# Altium PCB IMSAI_SIO_Emulation.PcbDoc
Units mil, origin at the board's own origin, x right, y up, seen from the top; angles counter-clockwise.
Board outline 10000 x 5455 mil, 2 copper layers (Top Layer, Bottom Layer); 85 components, 114 nets, 475 pads, 58 vias.
Unrouted connection lines stored in the file: 124.
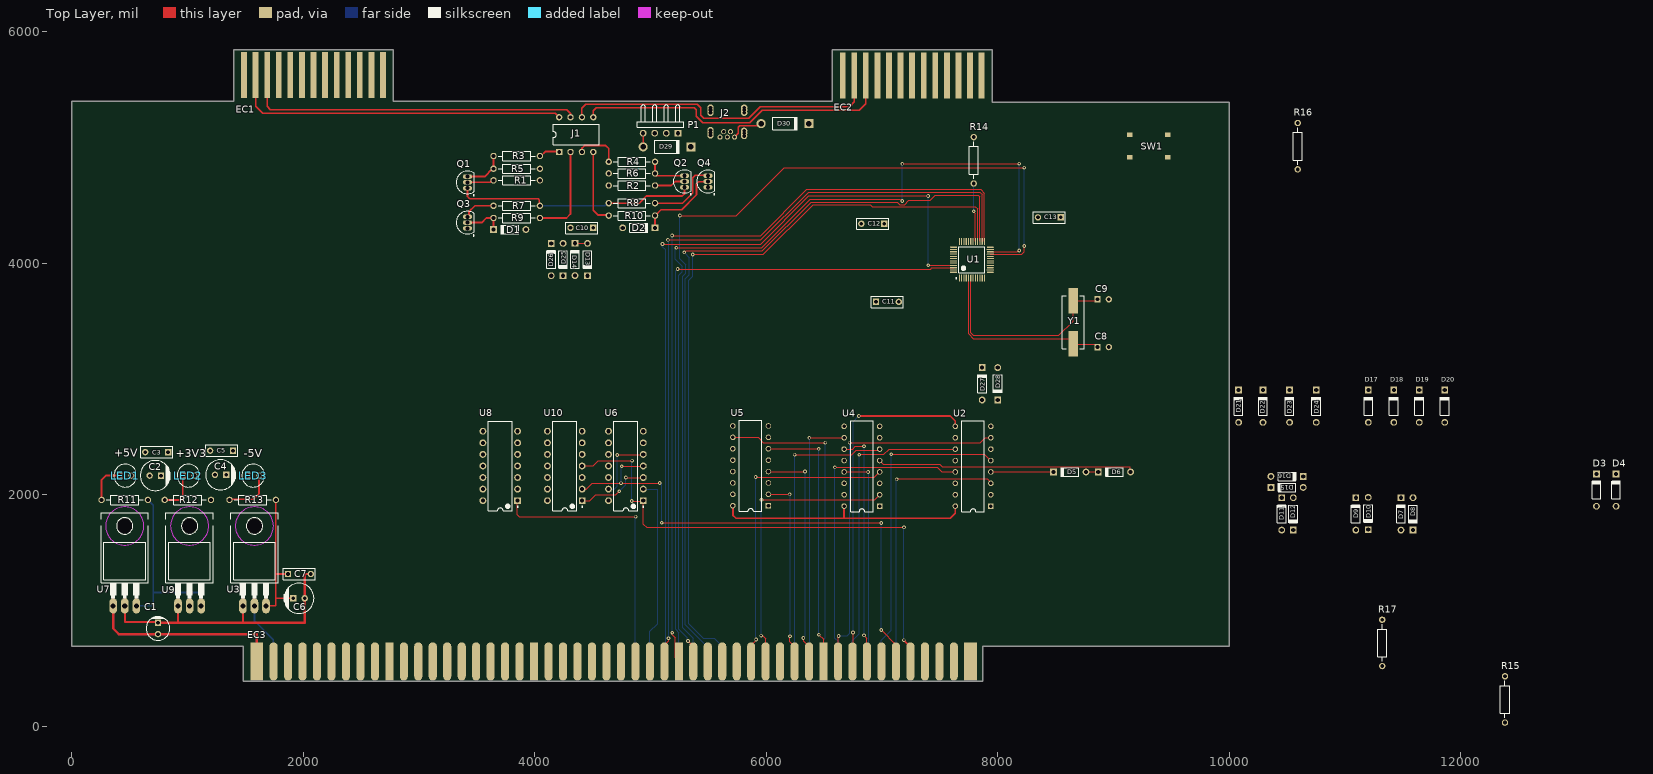
[diagram p0: Top Layer view]
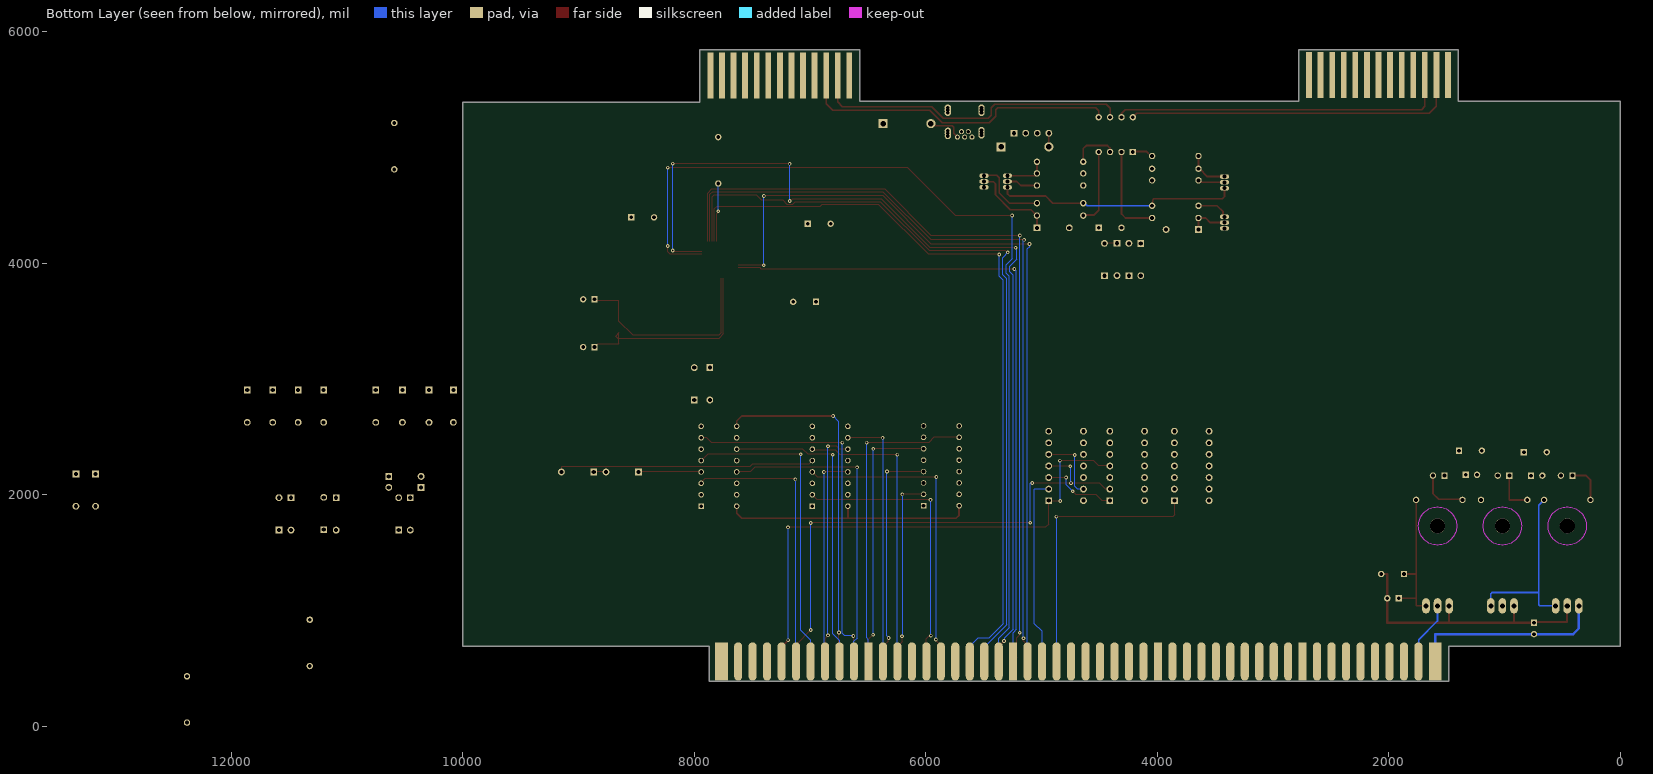
[diagram p1: Bottom Layer view, seen from below]

## Layer stack, top to bottom
Top Solder: solder mask 0.4, Solder Resist, Dk 3.5
Top Layer: signal copper 1.4
Dielectric 1: dielectric 12.6, FR-4, Dk 4.8
Bottom Layer: signal copper 1.4
Bottom Solder: solder mask 0.4, Solder Resist, Dk 3.5

## Board outline
1485,389.5 1485,689.5 0.5,689.5 0.5,5397.5 1400.5,5397.5 1400.5,5844.5 2780.5,5844.5 2780.5,5397.5 6570.5,5397.5 6570.5,5844.5 7950.5,5844.5 7950.5,5389.5 10000.5,5389.5 10000.5,689.5 7870,689.5 7870,389.5

## Design rules (kind name [scope] priority, off if disabled: settings)
Clearance [All] p1: gap=10 ignorepadtopadclearanceinfootprint=TRUE except(0: Arc-Text Track-Text SMDPad-Text THPad-Text Via-Text Fill-Text Poly-Text Region-Text; 1: Text-Text; 6: Arc-SMDPad Arc-THPad Track-SMDPad Track-THPad SMDPad-SMDPad SMDPad-THPad THPad-THPad; 8: Arc-Arc Arc-Track Arc-Via Track-Track Track-Via SMDPad-Via THPad-Via Via-Via)
PolygonConnect [All] p1: connectstyle=Relief reliefconductorwidth=10 reliefentries=4 polygonreliefangle="90 Angle" airgapwidth=10
RoutingVias [All] p1: holewidth=15.75 width=31.5 viastyle="Through Hole" minholewidth=11.81 minwidth=27.56 maxholewidth=78.74 maxwidth=118.11
SolderMaskExpansion [All] p1: expansion=4
Width [All] p1: maxlimit=50 minlimit=8 preferedwidth=15
30 further rules are at their usual default settings.

## Components (designator, comment, footprint, x,y, rotation, side; value= is the part's Value field where it differs from the comment)
C1 "Capacitor 10uF" "Cap THT 2.5-5-11" 747,845 r270 top value=10uF
C2 "Capacitor 100uF" "CAP THT 2.5-6.5-12" 723.79,2165 r180 top value=100uF
C3 "Capacitor .1uF" "CAP THT 2.5x5x5" 735.57,2368 r180 top value=.1uF
C4 "Capacitor 100uF" "CAP THT 2.5-6.5-12" 1288,2172 r180 top value=100uF
C5 "Capacitor .1uF" "CAP THT 2.5x5x5" 1296,2381 r180 top value=.1uF
C6 "Capacitor 100uF" "CAP THT 2.5-6.5-12" 1965,1105 r0 top value=100uF
C7 "Capacitor .1uF" "CAP THT 2.5x5x5" 1968.43,1315 r0 top value=.1uF
C8 "Capacitor 33pF" "Cap THT 2.5-2-4 Ceramic" 8910,3275 r0 top value=33pF
C9 "Capacitor 33pF" "Cap THT 2.5-2-4 Ceramic" 8910,3687.01 r0 top value=33pF
C10 "Capacitor .1uF" "CAP THT 2.5x5x5" 4408.43,4305 r180 top value=.1uF
C11 "Capacitor .1uF" "CAP THT 2.5x5x5" 7046.57,3665 r0 top value=.1uF
C12 "Capacitor .1uF" "CAP THT 2.5x5x5" 6920,4340 r180 top value=.1uF
C13 "Capacitor .1uF" "CAP THT 2.5x5x5" 8445,4395 r180 top value=.1uF
D1 "Diode 1N4148" DO-35 3784.76,4290 r180 top
D2 "Diode 1N4148" DO-35 4900.24,4305 r0 top
D3 "Diode 1N4148" DO-35 13170,2040 r90 top
D4 "Diode 1N4148" DO-35 13340,2040 r90 top
D5 "Diode 1N4148" DO-35 8622,2196.57 r180 top
D6 "Diode 1N4148" DO-35 9007,2196.57 r180 top
D7 "Diode 1N4148" DO-35 11482,1834 r90 top
D8 "Diode 1N4148" DO-35 11586,1834 r270 top
D9 "Diode 1N4148" DO-35 11092,1834 r90 top
D10 "Diode 1N4148" DO-35 11199,1837.76 r270 top
D11 "Diode 1N4148" DO-35 10452,1834 r90 top
D12 "Diode 1N4148" DO-35 10552,1834 r270 top
D13 "Diode 1N4148" DO-35 4457,4031 r270 top
D14 "Diode 1N4148" DO-35 4348,4032 r90 top
D15 "Diode 1N4148" DO-35 10498,2063 r180 top
D16 "Diode 1N4148" DO-35 10498,2158 r0 top
D17 "Diode 1N4148" DO-35 11200,2765 r90 top
D18 "Diode 1N4148" DO-35 11420,2765 r90 top
D19 "Diode 1N4148" DO-35 11640,2765 r90 top
D20 "Diode 1N4148" DO-35 11860,2765 r90 top
D21 "Diode 1N4148" DO-35 10080,2765 r90 top
D22 "Diode 1N4148" DO-35 10290,2765 r90 top
D23 "Diode 1N4148" DO-35 10520,2765 r90 top
D24 "Diode 1N4148" DO-35 10750,2765 r90 top
D25 "Diode 1N4148" DO-35 4246,4031 r270 top
D26 "Diode 1N4148" DO-35 4143,4031 r90 top
D27 "Diode 1N4148" DO-35 7865.12,2958 r90 top
D28 "Diode 1N4148" DO-35 7999.12,2958 r270 top
D29 "Diode 1N4001" DO-41 5142.91,5004 r0 top
D30 "Diode 1N4001" DO-41 6162,5205 r0 top
EC1 "S100 Serial Edge Connector" "E26 Edge Connector" 1490,5625 r0 top
EC2 "S100 Serial Edge Connector" "E26 Edge Connector" 6660,5620 r0 top
EC3 "S100 Connector" S100 1600,560 r0 top
J1 "DIP8 Jumper" DIP8 4211.57,4960 r90 top
J2 "USB Mini B" "USB Mini B" 5664,5088 r0 top
LED1 "Generic LED 5mm" "LED 5mm THT" 465,2165 r0 top
LED2 "Generic LED 5mm" "LED 5mm THT" 1010,2165 r0 top
LED3 "Generic LED 5mm" "LED 5mm THT" 1570,2165 r0 top
P1 "Header 4H" HDR1X4H 5237,5122 r180 top
Q1 "2N3906" TO-92A 3420,4697.48 r0 top
Q2 "2N3906" TO-92A 5295,4705 r0 top
Q3 "2N3904" TO-92A 3420,4350 r0 top
Q4 "2N3904" TO-92A 5497,4705 r0 top
R1 "Res2" AXIAL-0.4 3845,4715 r0 top
R2 "Res2" AXIAL-0.4 4840,4670 r180 top
R3 "Res2" AXIAL-0.4 3845,4925 r180 top
R4 "Res2" AXIAL-0.4 4840,4875 r0 top
R5 "Res2" AXIAL-0.4 3845,4815 r180 top
R6 "Res2" AXIAL-0.4 4840,4775 r0 top
R7 "Res2" AXIAL-0.4 3845,4495 r180 top
R8 "Res2" AXIAL-0.4 4840,4517.68 r0 top
R9 "Res2" AXIAL-0.4 3845,4390 r180 top
R10 "Res2" AXIAL-0.4 4840,4410 r0 top
R11 "Res2" AXIAL-0.4 460,1955 r0 top
R12 "Res2" AXIAL-0.4 1005,1955 r0 top
R13 "Res2" AXIAL-0.4 1565,1955 r0 top
R14 "Res2" AXIAL-0.4 7792,4888 r90 top
R15 "Res2" AXIAL-0.4 12380,231.56 r90 top
R16 "Res2" AXIAL-0.4 10590,5010 r90 top
R17 "Res2" AXIAL-0.4 11320,720 r90 top
SW1 "Button" SMD_PUSHBUTTON_LCSC 9468.74,4915 r180 top
U1 "STM32F103C8T6" STM-LQFP48_L 7776.54,4029.21 r90 top
U2 "74LS367" DIP16 7940,1901.3 r180 top
U3 "LM7805" TO220 1580,1290 r0 top
U4 "74LS367" DIP16 6979.56,1901.3 r180 top
U5 "74LS367" DIP16 6019.11,1904.72 r180 top
U6 "SN74LS10N" N0014A 4788,2248.23 r180 top
U7 "LM7805" TO220 460,1290 r0 top
U8 "SN74LS04N" N0014A 3703,2248.23 r180 top
U9 "AMS1117-3.3" TO220 1020,1290 r0 top
U10 "SN74LS09N" N0014A 4260.44,2248.23 r180 top
Y1 "=VALUE" "ABRACON ABLS" 8650,3490 r270 top

## Footprints (in the part's own frame and the unit in brackets; to place one, negate y for a bottom-side part, rotate by r counter-clockwise, add the part's x,y. Pads: shape width x height; smd on the part's side, far side on the other; paste and mask are expansions set on the pad)
"ABRACON ABLS" [mm] "Crystal, 2-Leads, Body 4.70x11.40mm, Pitch 8.80mm, IPC Medium Density"
  rect 5.6x2.1 smd: 1(-4.75,0) 2(4.75,0)
  silkscreen extent -5.77,-2.42 5.78,2.42, body extent -6.35,-2.35 6.35,2.35, height 4.2
AXIAL-0.4 [mm] "Axial Device, Thru-Hole; 2 Leads; 0.4 in Pin Spacing"
  round 1.4 hole 0.85: 1(-5.08,0) 2(5.08,0)
  silkscreen extent -4.06,-1.02 4.06,1.02
"Cap THT 2.5-2-4 Ceramic" [mm]
  round 1.4 hole 0.8: 1(1.25,0)
  rect 1.4x1.4 hole 0.8: 2(-1.25,0)
"Cap THT 2.5-5-11" [mm] "Capacitor 5mm Radius x 2.5mm lead spacing 11.5mm Height"
  round 1.4 hole 0.8: 1(1.25,0)
  rect 1.4x1.4 hole 0.8: 2(-1.25,0)
  silkscreen extent -2.6,-2.6 2.6,2.6, body extent -3.25,-3.25 3.25,3.25, height 11.51
"CAP THT 2.5-6.5-12" [mm]
  round 1.4 hole 0.8: 1(1.25,0)
  rect 1.4x1.4 hole 0.8: 2(-1.25,0)
  silkscreen extent -3.3,-3.3 3.3,3.3, body extent -3.25,-3.25 3.25,3.25, height 11.51
"CAP THT 2.5x5x5" [mm]
  rect 1.4x1.4 hole 0.8: 1(-2.5,0)
  round 1.4 hole 0.8: 2(2.5,0)
  silkscreen extent -3.5,-1.25 3.5,1.25, body extent -3.56,-1.27 3.43,1.27, height 6.5
DIP8 [mm]
  rect 1.4x1.4 hole 0.8: 1(0,0)
  round 1.4 hole 0.8: 2(0,-2.5) 3(0,-5) 4(0,-7.5) 5(7.62,-7.5) 6(7.62,-5) 7(7.62,-2.5) 8(7.62,0)
  silkscreen extent 1.53,-8.75 6.09,1.25
DIP16 [mm]
  rect 1.2x1.2 hole 0.8: 1(0,0)
  round 1.2 hole 0.8: 2(0,-2.5) 3(0,-5) 4(0,-7.5) 5(0,-10) 6(0,-12.5) 7(0,-15) 8(0,-17.5) 9(7.8,-17.5) 10(7.8,-15) 11(7.8,-12.5) 12(7.8,-10) 13(7.8,-7.5) 14(7.8,-5) 15(7.8,-2.5) 16(7.8,0)
  silkscreen extent 1.43,-18.75 6.37,1.25
DO-35 [mm] "Diode, Axial; Body 3.8 x 1.9 mm (LxDia. max), Lead Dia. 0.53 mm (max)"
  round 1.5 hole 0.9: 1(-3.55,0)
  rect 1.5x1.5 hole 0.9: 2(3.55,0)
  silkscreen extent -1.95,-0.95 2.05,0.95
DO-41 [mm] "Diode, Axial; Body 5.2 x 2.7 mm (LxDia. max), Lead Dia. 0.86 mm (max)"
  round 2 hole 1.2: 1(-5.23,0)
  rect 2x2 hole 1.2: 2(5.23,0)
  silkscreen extent -2.65,-1.4 2.75,1.4
"E26 Edge Connector" [mil] "26 Pin Edge Connector"
  rect 50x400 smd: 1(0,0) 3(100,0) 5(200,0) 7(300,0) 9(400,0) 11(500,0) 13(600,0) 15(700,0) 17(800,0) 19(900,0) 21(1000,0) 23(1100,0) 25(1200,0)
  rect 50x400 smd far side: 2(0,0) 4(100,0) 6(200,0) 8(300,0) 10(400,0) 12(500,0) 14(600,0) 16(700,0) 18(800,0) 20(900,0) 22(1000,0) 24(1100,0) 26(1200,0)
HDR1X4H [mm] "Connector; Header; 4 Position; Right Angle"
  rect 1.5x1.5 hole 0.9: 1(0,0)
  round 1.5 hole 0.9: 2(2.54,0) 3(5.08,0) 4(7.62,0)
  silkscreen extent -1.27,-6.35 8.89,-1.27
"LED 5mm THT" [mil]
  rect 55x55 hole 35.43: 1(-50,0)
  round 55 hole 35.43: 2(50,0)
  silkscreen extent -99,-99 90,99
N0014A [mm] "DIP, 14-Leads, Body 19.7x6.6mm, Pitch 2.54mm"
  rect 1.5x1.5 hole 0.9: 1(-3.81,7.62)
  round 1.5 hole 0.9: 2(-3.81,5.08) 3(-3.81,2.54) 4(-3.81,0) 5(-3.81,-2.54) 6(-3.81,-5.08) 7(-3.81,-7.62) 8(3.81,-7.62) 9(3.81,-5.08) 10(3.81,-2.54) 11(3.81,0) 12(3.81,2.54) 13(3.81,5.08) 14(3.81,7.62)
  silkscreen extent -3.94,-9.85 2.65,9.85, body extent -3.95,-9.85 3.95,9.85, height 5.08
S100 [mil]
  rect 110x330 smd: 1(0,0) 50(6165,0)
  oval 70x330 smd: 2(145,0) 3(270,0) 4(395,0) 5(520,0) 6(645,0) 7(770,0) 8(895,0) 9(1020,0) 11(1270,0) 12(1395,0) 13(1520,0) 14(1645,0) 15(1770,0) 16(1895,0) 17(2020,0) 18(2145,0) 19(2270,0) 21(2520,0) 22(2645,0) 23(2770,0) 24(2895,0) 25(3020,0) 26(3145,0) 27(3270,0) 28(3395,0) 29(3520,0) 31(3770,0) 32(3895,0) 33(4020,0) 34(4145,0) 35(4270,0) 36(4395,0) 37(4520,0) 38(4645,0) 39(4770,0) 41(5020,0) 42(5145,0) 43(5270,0) 44(5395,0) 45(5520,0) 46(5645,0) 47(5770,0) 48(5895,0) 49(6020,0)
  rect 70x330 smd: 10(1145,0) 20(2395,0) 30(3645,0) 40(4895,0)
  rect 110x330 smd far side: 51(0,0) 100(6165,0)
  oval 70x330 smd far side: 52(145,0) 53(270,0) 54(395,0) 55(520,0) 56(645,0) 57(770,0) 58(895,0) 59(1020,0) 61(1270,0) 62(1395,0) 63(1520,0) 64(1645,0) 65(1770,0) 66(1895,0) 67(2020,0) 68(2145,0) 69(2270,0) 71(2520,0) 72(2645,0) 73(2770,0) 74(2895,0) 75(3020,0) 76(3145,0) 77(3270,0) 78(3395,0) 79(3520,0) 81(3770,0) 82(3895,0) 83(4020,0) 84(4145,0) 85(4270,0) 86(4395,0) 87(4520,0) 88(4645,0) 89(4770,0) 91(5020,0) 92(5145,0) 93(5270,0) 94(5395,0) 95(5520,0) 96(5645,0) 97(5770,0) 98(5895,0) 99(6020,0)
  rect 70x330 smd far side: 60(1145,0) 70(2395,0) 80(3645,0) 90(4895,0)
SMD_PUSHBUTTON_LCSC [mm]
  rect 1.15x1 smd: 1(0,0) 1(8.35,0) 2(0,-4.9) 2(8.35,-4.9)
STM-LQFP48_L [mm] "QFP, 48-Leads, Body 7x7mm, Pitch 0.5mm, IPC High Density"
  oval 1.55x0.25 smd: 1(-4.025,2.75) 2(-4.025,2.25) 3(-4.025,1.75) 4(-4.025,1.25) 5(-4.025,0.75) 6(-4.025,0.25) 7(-4.025,-0.25) 8(-4.025,-0.75) 9(-4.025,-1.25) 10(-4.025,-1.75) 11(-4.025,-2.25) 12(-4.025,-2.75) 25(4.025,-2.75) 26(4.025,-2.25) 27(4.025,-1.75) 28(4.025,-1.25) 29(4.025,-0.75) 30(4.025,-0.25) 31(4.025,0.25) 32(4.025,0.75) 33(4.025,1.25) 34(4.025,1.75) 35(4.025,2.25) 36(4.025,2.75)
  oval 0.25x1.55 smd: 13(-2.75,-4.025) 14(-2.25,-4.025) 15(-1.75,-4.025) 16(-1.25,-4.025) 17(-0.75,-4.025) 18(-0.25,-4.025) 19(0.25,-4.025) 20(0.75,-4.025) 21(1.25,-4.025) 22(1.75,-4.025) 23(2.25,-4.025) 24(2.75,-4.025) 37(2.75,4.025) 38(2.25,4.025) 39(1.75,4.025) 40(1.25,4.025) 41(0.75,4.025) 42(0.25,4.025) 43(-0.25,4.025) 44(-0.75,4.025) 45(-1.25,4.025) 46(-1.75,4.025) 47(-2.25,4.025) 48(-2.75,4.025)
  silkscreen extent -4.15,-2.85 2.85,3.55, body extent -3.5,-3.5 3.5,3.5, height 1.6
TO220 [mil]
  oval 66x132 hole 44: 1(-100,-250) 2(0,-250) 3(100,-250)
  round 130 hole 130 unplated: None(0,440)
  Keep-Out Layer circle w0: c0,440 r165
  Keep-Out Layer circle w0: c0,440 r165
  Keep-Out Layer circle w0: c0,440 r165
  Keep-Out Layer circle w0: c0,440 r165
  Keep-Out Layer circle w0: c0,440 r165
  Keep-Out Layer circle w0: c0,440 r165
  silkscreen extent -205,-185 205,555, body extent -243,-310 225,560, height 69
TO-92A [mm] "TO, Flat Index; 3 In-Line, Axial Leads; Body Dia. 4.5mm; Leads 0.51 x 0.48 mm (max)"
  oval 2x1 hole 0.9: 1(0,-1.27) 2(0,0) 3(0,1.27)
  silkscreen extent -2.48,-2.95 1.5,2.48, body extent -2.48,-2.5 1.5,2.5, height 6.86
"USB Mini B" [mm]
  round 1.1 hole 0.7: 1(1.6,0) 2(0.7,1.2) 3(0,0) 4(-0.8,1.2) 5(-1.6,0)
  round 1.4 hole 0.8: 6(-3.7,5.334) 6(-3.7,5.95) 6(-3.7,6.477) 6(-3.683,0.381) 6(-3.683,0.997) 6(-3.683,1.524) 6(3.683,0.254) 6(3.683,0.87) 6(3.683,1.397) 6(3.7,5.334) 6(3.7,5.95) 6(3.7,6.477)

## Part data
D1 D2 D3 D4 D5 D6 D7 D8 D9 D10 D11 D12 D13 D14 D15 D16 D17 D18 D19 D20 D21 D22 D23 D24 D25 D26 D27 D28: "High Conductance Fast Diode", Code_JEDEC=DO-204-AH, ComponentLink1Description="Manufacturer Link", ComponentLink1URL=http://www.fairchildsemi.com/, ComponentLink2Description=Datasheet, ComponentLink2URL=http://www.fairchildsemi.com/ds/1N%2F1N4148.pdf, DatasheetVersion=1997, LatestRevisionDate=17-Jul-2002, LatestRevisionNote="Re-released for DXP Platform.", PackageDescription="Diode, Axial; Body 3.8 x 1.9 mm (LxDia. max), Lead Dia. 0.53 mm (max)", PackageReference=DO-35, Published=8-Jun-2000, Publisher="Altium Limited"
D29 D30: "1 Amp General Purpose Rectifier", Code_JEDEC=DO-204-AL, ComponentLink1Description="Manufacturer Link", ComponentLink1URL=http://www.fairchildsemi.com/, ComponentLink2Description=Datasheet, ComponentLink2URL=http://www.fairchildsemi.com/ds/1N%2F1N4001.pdf, DatasheetVersion=1998, LatestRevisionDate=17-Jul-2002, LatestRevisionNote="Re-released for DXP Platform.", PackageDescription="Diode, Axial; Body 5.2 x 2.7 mm (LxDia. max), Lead Dia. 0.86 mm (max)", PackageReference=DO-41, PackageVersion=Aug-1999, Published=8-Jun-2000, Publisher="Altium Limited"
J2: "MINI USB A - 5POS Horizontal through hole", Package=None, Availability=Good, MF="Wurth Electronics", MP=651005136521, Price="1.78 USD", SnapEDA_Link=https://www.snapeda.com/symbols-footprints/651005136521/Wurth%20Electronics%20Inc/view-part/?ref=snap
P1: "Header, 4-Pin, Right Angle", LatestRevisionDate=17-Jul-2002, LatestRevisionNote="Re-released for DXP Platform.", Publisher="Altium Limited"
Q1 Q2: "2N3906 GP PNP", ComponentLink1Description="Manufacturer Link", ComponentLink1URL=http://www.fairchildsemi.com/, ComponentLink2Description=Datasheet, ComponentLink2URL=http://www.fairchildsemi.com/ds/2N%2F2N3906.pdf, DatasheetVersion=1997, LatestRevisionDate=15-Jan-2003, LatestRevisionNote="PCB Footprint 'BCY-W3/D4.7' replaced", PackageDescription="TO, Flat Index; 3 In-Line, Axial Leads; Body Dia. 4.5mm; Leads 0.51 x 0.48 mm (max)", PackageReference=TO-92A, PackageVersion=Sep-1998, Published=8-Jun-2000, Publisher="Altium Limited"
Q3 Q4: "NPN General Purpose Amplifier", ComponentLink1Description="Manufacturer Link", ComponentLink1URL=http://www.fairchildsemi.com/, ComponentLink2Description=Datasheet, ComponentLink2URL=http://www.fairchildsemi.com/ds/2N%2F2N3904.pdf, DatasheetVersion=1997, LatestRevisionDate=15-Jan-2003, LatestRevisionNote="PCB Footprint 'BCY-W3/D4.7' replaced", PackageDescription="TO, Flat Index; 3 In-Line, Axial Leads; Body Dia. 4.5mm; Leads 0.51 x 0.48 mm (max)", PackageReference=TO-92A, PackageVersion=Sep-1998, Published=8-Jun-2000, Publisher="Altium Limited"
R1 R2 R3 R4 R5 R6 R7 R8 R9 R10 R11 R12 R13 R14 R15 R16 R17: "Resistor", LatestRevisionDate=17-Jul-2002, LatestRevisionNote="Re-released for DXP Platform.", PackageDescription="Axial Device, Thru-Hole; 2 Leads; 0.4 in Pin Spacing", PackageReference=AXIAL-0.4, Published=8-Jun-2000, Publisher="Altium Limited"
  R1 R2 R9 R10 R14 R15 R16 R17: =10K
  R3 R4 R7 R8: =1K
  R5 R6: =4.7K
  R11 R13: =680R
  R12: =430R
SW1: "LCSC Push button SMD"
U1: "ARM Cortex-M3 32-bit MCU, 64 KB Flash, 20 KB Internal RAM, 37 I/Os, 48-pin LQFP, -40 to 85 degC, Tray", I/Os (High Current)=37, Operating Frequency(F) (Processor speed) (MHz)=72, Supplier Part Number 1=497-6063-ND, Supply Voltage(Vcc) min (V)=2, A/D Converter="2x12-bit (10 Channel)", ComponentLink1Description="Manufacturer URL", ComponentLink1URL=http://www.st.com/web/en/home.html, ComponentLink2Description=Datasheet, ComponentLink2URL=http://www.st.com/st-web-ui/static/active/en/resource/technical/document/datasheet/CD00161566.pdf, ComponentLink3Description="Package Specification", ComponentLink3URL=http://www.st.com/st-web-ui/static/active/en/resource/technical/document/datasheet/DM00058181.pdf, Core="ARM Cortex-M3", DatasheetVersion="Rev. 16", FLASH Size (Prog) (kB)=64, Internal RAM Size (kB)=20, Mounting Technology="Surface Mount", PackageDescription="48-Pin Low Profile Quad Flat Package, 7 x 7 mm Body, 0.5 mm Pitch", PackageReference=LQFP48, PackageVersion="Rev. 6, 06/2013", Packing=Tray, PartNumber=STM32F103C8T6, Supplier 1=Digi-Key, Supplier 2=Farnell, Supplier 3=Newark, Supplier 4=Newark, Supplier 5=Mouser, Supplier Part Number 2=1447637, Supplier Part Number 3=59M2182, Supplier Part Number 4=57P1222, Supplier Part Number 5=511-STM32F103C8T6
U3 U7: "LM7805 Linear Voltage Regulator"
U6: "Triple 3-input positive-NAND gates, N0014A, TUBE", F @ Nom Voltage(Max)(Mhz)=35, Generic Part Number=SN74LS10, ICC @ Nom Voltage(Max)(mA)=0.027, Manufacturer="Texas Instruments", Operating Temperature Range(C)="0 to 70", Rating=Catalog, Supplier Part Number 1=595-SN74LS10N, tpd @ Nom Voltage(Max)(ns)=5, Bits(#)=3, Code_JEDEC=MS-001, ComponentLink1Description="Manufacturer URL", ComponentLink1URL=http://www.ti.com/, ComponentLink2Description=Datasheet, ComponentLink2URL=http://www.ti.com/lit/ds/symlink/sn74ls10.pdf, ComponentLink3Description="Package Specification", ComponentLink3URL=http://www.ti.com/lit/ml/mpdi002c/mpdi002c.pdf, DatasheetVersion=SDLS035A, Input Type=TTL, Output Drive (IOL/IOH)(Max)(mA)=1/-20, Output Type=TTL, PackageReference=N0014A, PartNumber=SN74LS10N, Schmitt Trigger=No, Supplier 1=Mouser, Supplier 2=Digi-Key, Supplier Part Number 2=296-1634-5-ND, Technology Family=LS, VCC(Max)(V)=5.25, VCC(Min)(V)=4.75, Voltage(Nom)(V)=5
U8: "Hex inverters, N0014A, TUBE", F @ Nom Voltage(Max)(Mhz)=35, Generic Part Number=SN74LS04, ICC @ Nom Voltage(Max)(mA)=0.033, Manufacturer="Texas Instruments", Operating Temperature Range(C)="0 to 70", Rating=Catalog, tpd @ Nom Voltage(Max)(ns)=22, Voltage(Nom)(V)=5, Bits(#)=6, ComponentLink1Description="Manufacturer URL", ComponentLink1URL=http://www.ti.com/, ComponentLink2Description=Datasheet, ComponentLink2URL=http://www.ti.com/lit/ds/symlink/sn74ls04.pdf, ComponentLink3Description="Package Specification", ComponentLink3URL=http://www.ti.com/lit/ml/mpdi002c/mpdi002c.pdf, DatasheetVersion=SDLS029C, Input Type=TTL, Output Drive (IOL/IOH)(Max)(mA)=-0.4/8, Output Type=CMOS, PackageReference=N0014A, PartNumber=SN74LS04N, Schmitt Trigger=No, Technology Family=LS, VCC(Max)(V)=5.25, VCC(Min)(V)=4.75
U9: "1-Amp 3.3-Volt Low Drop Out Voltage Regulatator", Package=None, Availability=Unavailable, MF="Advanced Monolithic Systems", MP=AMS1117-3.3, Price=None, SnapEDA_Link=https://www.snapeda.com/parts/AMS1117-3.3/Advanced%20Monolithic%20Systems/view-part/?ref=snap
U10: "Quad 2-input positive-AND gates with open collector outputs, N0014A, TUBE", F @ Nom Voltage(Max)(Mhz)=35, Generic Part Number=SN74LS09, ICC @ Nom Voltage(Max)(mA)=0.0048, Manufacturer="Texas Instruments", Operating Temperature Range(C)="0 to 70", Rating=Catalog, Supplier Part Number 1=595-SN74LS09N, Voltage(Nom)(V)=5, Bits(#)=4, ComponentLink1Description="Manufacturer URL", ComponentLink1URL=http://www.ti.com/, ComponentLink2Description=Datasheet, ComponentLink2URL=http://www.ti.com/lit/ds/symlink/sn74ls09.pdf, DatasheetVersion=SDLS034, Input Type=TTL, Output Drive (IOL/IOH)(Max)(mA)=-0.8/16, Output Type=TTL, PackageReference=N0014A, PartNumber=SN74LS09N, Schmitt Trigger=No, Supplier 1=Mouser, Supplier 2=Digi-Key, Supplier Part Number 2=296-3631-5-ND, Technology Family=LS, tpd @ Nom Voltage(Max)(ns)=35, VCC(Max)(V)=5.25, VCC(Min)(V)=4.75
Y1: library part "Abracon Crystal ABLS", "SMT Crystal"
C1 C2 C3 C4 C5 C6 C7 C8 C9 C10 C11 C12 C13: LatestRevisionDate=17-Jul-2002, LatestRevisionNote="Re-released for DXP Platform.", PackageDescription="Polarized Capacitor (Radial); 2 Leads", PackageReference=RB7.6-15, Published=8-Jun-2000, Publisher="Altium Limited"

## Via types
v1: diameter 31.5, hole 15.75, Top Layer to Bottom Layer, 58 vias

## Nets (pads, with @x,y where several pads share a name; then routed paths per layer and width w, separated by ;. In a path a pad name is that pad's centre, name@x,y a point inside that pad or via, vN(x,y) a via of type N, cw(c..) or ccw(c..) an arc to the next point about the centre after c; other vN are vias at no path point)
+3V3: C4.1 C5.2 C10.2 C11.2 C12.2 C13.2 Q1.1 Q2.1 R7.1 R8.1 R12.2 R17.2 U1.9 U1.24 U1.36 U1.48 U9.2 | length 2119.2
  Top Layer w15: Q1.1 3420,4575 3440,4555 4030,4555 4039.94,4545.06 4039.94,4500.06 R7.1 ; R8.1 4902.68,4517.68 4965,4580 5275,4580 5295,4600 5295,4645.29 5285.29,4655 Q2.1
  Bottom Layer w15: R7.1 4606.47,4495 4629.14,4517.68 R8.1
+5: C2.1 C3.2 D29.2 D30.2 R11.2 R14.2 R16.2 U2.16 U4.16 U5.16 U6.14 U7.3 U8.14 U9.3 U10.14 | length 3794
  Top Layer w15: U5.16 5712.03,1823.97 5739,1797 6674,1797 ; U4.16 6672.47,1798.53 6674,1797 ; U2.16 7632.91,1840.91 7589,1797 6674,1797
  Bottom Layer w15: U7.3 696.21,1040 705,1048.79 705,1155 ; R11.2 705,1910 705,1155 ; U9.3 1120,1145 1110,1155 705,1155
+8: C1.1 EC3.1 EC3.51 U7.1 | length 3383.2
  Top Layer w20: U7.1 360,845 409,796 1600,796 EC3.1
  Bottom Layer w20: U7.1 360,844 408,796 1600,796 EC3.51
+16: EC3.2
-5: C6.2 C7.1 R5.1 R6.1 R13.2 U3.3 | length 1255.8
  Top Layer w15: U3.3 1765,1040 1765,1105 ; R13.2 1765,1315 ; C7.1 1765,1315 ; C6.2 1765,1105 ; 1765,1105 1765,1315
-16: EC3.52 U3.2 | length 548.3
  Bottom Layer w15: U3.2 1580,910 1742.5,747.5 1742.5,562.5 EC3.52
\DI_EN: U2.1 U2.15 U4.15 U6.12
\DO_EN: U4.1 U5.1 U6.6
\pWR: EC3.77 U1.38 U8.1 | length 2404.3
  Top Layer w10: U8.1 3849,1944.23 3849,1827 3865,1811 v1(4872,1811)
  Bottom Layer w10: EC3.77 4870,1809 v1(4872,1811)
A0: EC3.79 U1.45 | length 6901.6
  Top Layer w8: v1(5104,4165) 5953,4165 6368,4580 v1(7398,4580) ; v1(7399,3982) 7401,3980 U1.45
  Bottom Layer w8: v1(5104,4165) 5104,4141 5127,4118 5127,567 EC3.79 ; v1(7398,4580) 7398.5,4579.5 7398.5,3982.5 v1(7399,3982)
A1: EC3.80 U1.46 | length 5795
  Top Layer w8: v1(5235,3949) 7420,3949 7431.31,3960.31 U1.46
  Bottom Layer w8: v1(5235,3949) 5218,3932 5218,836 5245,809 EC3.80
A2: EC3.81 U1.21 | length 8096.7
  Top Layer w8: v1(5254,4411) 5743,4411 6157,4825 v1(8229,4825) ; U1.21 8207.43,4078.43 8228,4099 8228,4147 v1(8229,4148)
  Bottom Layer w8: v1(5254,4411) 5254,4038 5306,3986 5306,3914 5278,3886 5278,852 5370,760 EC3.81 ; v1(8229,4148) v1(8229,4825)
A3: EC3.31 U1.22 | length 8131.8
  Top Layer w8: v1(5224,4133) 5962,4133 6380,4551 7155,4551 7169,4537 v1(7174,4537) ; v1(5324,737) 5370,691 EC3.31 ; v1(7176,4857) 7177,4858 8184,4858 v1(8185,4859) ; U1.22 8167.75,4098.11 8178.64,4109 v1(8185,4109)
  Bottom Layer w8: v1(5224,4133) 5220.69,4133 5216,4128.31 5216,4033 5276,3973 5276,3927 5245,3896 5245,839 5319.5,764.5 5319.5,741.5 v1(5324,737) ; v1(7174,4537) 7174,4855 v1(7176,4857) ; v1(8185,4109) v1(8185,4859)
A4: EC3.30 U1.25 | length 6995.2
  Top Layer w8: v1(5187,4238) 5954,4238 6352,4636 7853,4636 7884.8,4604.2 U1.25 ; v1(5189,808) 5188,807 5188,789 5214,763 5214,591 EC3.30
  Bottom Layer w8: v1(5187,4238) 5189,4236 v1(5189,808)
A5: EC3.29 U1.26 | length 6956.6
  Top Layer w8: EC3.29 5130.38,570.38 5130.38,712.38 5156.33,738.33 v1(5156.33,760) ; v1(5151,4201) 5954,4201 6366,4613 7845,4613 7865.12,4592.88 U1.26
  Bottom Layer w8: v1(5151,4201) 5156.33,4195.67 v1(5156.33,760)
A6: EC3.82 U1.27 | length 6813
  Top Layer w8: v1(5292,4093) 5298.36,4093 5311.36,4106 5967,4106 6388,4527 7130,4527 7151,4506 7195,4506 7232,4543 7415,4543 7459,4587 7832,4587 7845.43,4573.57 U1.27
  Bottom Layer w8: v1(5292,4093) 5337,4048 5337,3900 5302,3865 5302,876 5495,683 EC3.82
A7: EC3.83 U1.28 | length 6640.5
  Top Layer w8: v1(5365,4075) 5974,4075 6404,4505 6898,4505 6914,4489 7807,4489 7825.75,4470.25 U1.28
  Bottom Layer w8: v1(5365,4075) 5365,3887 5330,3852 5330,886 5457.11,758.89 5551.11,758.89 5620,690 EC3.83
A8: EC3.84
A9: EC3.34
A10: EC3.37
A11: EC3.87
A12: EC3.33
A13: EC3.85
A14: EC3.86
A15: EC3.32
ACTIVE: R14.1 U1.29 U6.5 U6.13 | length 1091.1
  Top Layer w8: v1(4714,2343) 4716.61,2345.61 4935.39,2345.61 U6.5 ; v1(7792,4448) 7792,4441.64 7806.06,4427.58 U1.29
  Bottom Layer w8: U6.13 4688.23,2048.23 4714,2074 v1(4714,2343) ; v1(7792,4448) 7792,4677 R14.1@7802,4687
DI0: EC3.95 U2.3 | length 2413.2
  Top Layer w10: v1(7126,2132) 7132,2138 7910,2138 7940,2108 U2.3
  Bottom Layer w10: EC3.95 7123,563 7123,2129 v1(7126,2132)
DI1: EC3.94 U2.5 | length 2708
  Top Layer w10: v1(7080,2350) 7885,2350 U2.5
  Bottom Layer w10: EC3.94 6995,745 7080,830 v1(7080,2350)
DI2: EC3.41 U2.7 | length 3211.5
  Top Layer w10: EC3.41@6622.5,562.5 v1@6622.5,777.5 ; v1(6720,2450) 7850,2450 7891.85,2491.85 U2.7
  Top Layer w15: EC3.41 EC3.41@6622.5,562.5 ; v1@6622.5,777.5 v1(6625,780)
  Bottom Layer w10: v1(6625,780) 6698,780 6720,802 v1(6720,2450)
DI3: EC3.42 U2.9 | length 3026.9
  Top Layer w10: EC3.42@6750,575 v1(6750,810)
  Top Layer w15: v1(6800,2680) 7589.31,2680 7632.91,2636.4 U2.9
  Bottom Layer w10: v1(6750,810) 6750,2630 v1(6800,2680)
  Bottom Layer w15: U2.9@7630,2593.19 U2.9
DI4: EC3.91 U2.13 | length 2743.4
  Top Layer w10: v1(6593,2236) 7478,2236 7517.43,2196.57 U2.13
  Bottom Layer w10: v1(6593,2236) 6593,761 6620,734 EC3.91
DI5: EC3.92 U2.11 | length 2659
  Top Layer w10: v1(6803,2345) 6807,2349 7017,2349 7061.43,2393.43 U2.11
  Bottom Layer w10: EC3.92 6745,740 6803,798 v1(6803,2345)
DI6: EC3.93 U4.13 | length 1847.9
  Top Layer w10: U4.13 6672.76,2196.29 6879.71,2196.29 v1(6880,2196)
  Bottom Layer w10: EC3.93 6880,570 v1(6880,2196)
DI7: EC3.43 U4.11 | length 2051.9
  Top Layer w10: U4.11 6745.43,2393.43 6770,2418 v1(6845,2418) ; v1(6844,785) 6870,759 EC3.43
  Bottom Layer w10: v1(6844,785) 6845,786 v1(6845,2418)
DO0: EC3.36 U4.2 | length 2458.5
  Top Layer w10: v1(5956,783) 5968,783 5995,756 EC3.36 ; v1(5959,1955) 5960,1956 6935.83,1956 U4.2
  Bottom Layer w10: v1(5956,783) 5957.5,784.5 5957.5,1953.5 v1(5959,1955)
DO1: EC3.35 U4.4 | length 2703.3
  Top Layer w10: EC3.35 5870,701.18 5913,744.18 v1(5913,750) ; v1(5908,2153) 5909,2152 6934.98,2152 U4.4
  Bottom Layer w10: v1(5908,2153) 5910.5,2150.5 5910.5,752.5 v1(5913,750)
DO2: EC3.88 U4.6 | length 2540.2
  Top Layer w10: v1(6245,2346) 6739,2346 6777,2384 6970.13,2384 U4.6
  Bottom Layer w10: EC3.88 v1(6245,2346)
DO3: EC3.89 U4.10 | length 2232.1
  Top Layer w10: v1(6373,2491) 6373.43,2491.43 6672.04,2491.43 U4.10
  Bottom Layer w10: EC3.89 6370,2481 6373,2484 v1(6373,2491)
DO4: EC3.38 U5.2 | length 1643.8
  Top Layer w10: U5.2 6019.26,2003 v1(6202,2003) ; v1(6205,778) 6205,730 6245,690 EC3.38
  Bottom Layer w10: v1(6202,2003) 6202,2001.15 6205,1998.15 v1(6205,778)
DO5: EC3.39 U5.4 | length 1982
  Top Layer w10: U5.4 v1(6335,2200) ; v1(6321,763) 6325.11,758.89 6325.11,734.89 6370,690 EC3.39
  Bottom Layer w10: v1(6321,763) 6321,768.82 6335,782.82 v1(6335,2200)
DO6: EC3.40 U5.6 | length 2288.2
  Top Layer w10: U5.6 6019.54,2396.43 6453.57,2396.43 v1(6454,2396) ; v1(6455,791) 6495,751 EC3.40
  Bottom Layer w10: v1(6454,2396) 6455,2395 v1(6455,791)
DO7: EC3.90 U5.10 | length 2714.4
  Top Layer w10: U5.10 5930.72,2495.28 5976,2450 v1(6511,2450)
  Bottom Layer w10: EC3.90 6495,747 6511,763 v1(6511,2450)
GND: C1.2 C2.2 C3.1 C4.2 C5.1 C6.1 C7.2 C8.1 C9.1 C10.1 C11.1 C12.1 C13.1 D1.1 D2.1 EC1.13 EC2.13 EC3.50 EC3.100 J2.5 LED1.2 LED2.2 LED3.1 P1.1 Q3.1 Q4.1 R15.1 SW1.1 U1.8 U1.23 U1.35 U1.47 U2.8 U3.1 U4.8 U5.8 U6.7 U7.2 U8.7 U9.1 U10.7 | length 2460.9
  Top Layer w20: U7.2 462,1038 462,900 741.21,900 C1.2 920,894.21 ; U9.1 920,894.21 ; U3.1 1481,1039 1481,894.21 ; C7.2 2014.21,1315 C6.1 2014.21,894.21 1481,894.21 ; 920,894.21 1481,894.21
IN0: D3.2 U1.18 U2.2
IN1: D5.2 U1.19 U2.4 | length 542.2
  Top Layer w8: U2.4 D5.2
IN2: D7.2 U1.20 U2.6
IN3: D9.2 U1.39 U2.10
IN4: D11.2 U1.40 U2.12
IN5: D15.2 U1.41 U2.14
IN6: D19.2 U1.42 U4.12
IN7: D23.2 U1.43 U4.14
IN_ACTIVE: D18.1 U10.6
IN_ACTIVE_3v3: D17.2 U1.15
NetC8_2: C8.2 U1.5 Y1.2 | length 1796.6
  Top Layer w8: U1.5 7747.01,3387.99 7786,3349 Y1.2@8650,3349 ; C8.2 8837.23,3298.56 8654.43,3298.56 Y1.2 Y1.2@8650,3349 ; Y1.2@8650,3349 8658,3349 8678.5,3369.5 8650,3398 Y1.2@8650,3349
NetC9_2: C9.2 U1.6 Y1.1 | length 1809.7
  Top Layer w8: U1.6 7766.69,3398.31 7790,3375 8526,3375 8650,3499 Y1.1 8850.79,3677.01 C9.2
NetD1_2: D1.2 Q3.2 R9.2 | length 341.6
  Top Layer w15: Q3.2 3543.43,4350 3583.43,4390 R9.2 D1.2
NetD2_2: D2.2 Q4.2 R10.2 | length 719.8
  Top Layer w15: D2.2 R10.2@5040,4390 ; R10.2 5091,4461 5269,4461 5398,4590 5398,4685 5415,4702 5494,4702 Q4.2
NetD3_1: D3.1 D4.2
NetD5_1: D5.1 D6.2 | length 105.5
  Top Layer w8: D5.1 D6.2
NetD7_1: D7.1 D8.2
NetD9_1: D9.1 D10.2
NetD11_1: D11.1 D12.2
NetD13_1: D13.1 D14.2 | length 126
  Top Layer w10: D14.2@4366,4170.76 D13.1@4451,4170.76 ; D13.1@4484,4169.76 D13.1@4471,4169.76 ; D13.1@4471,4169.76 4457,4169.76 D13.1@4471,4169.76
NetD15_1: D15.1 D16.2
NetD17_1: D17.1 D18.2
NetD19_1: D19.1 D20.2
NetD21_1: D21.1 D22.2
NetD23_1: D23.1 D24.2
NetD25_1: D25.1 D26.2
NetD27_1: D27.1 D28.2
NetD29_1: D29.1 P1.4 | length 118
  Top Layer w15: D29.1 P1.4
NetD30_1: D30.1 J2.1 | length 308
  Top Layer w12: J2.1 5760,5121.01 5760,5173 5773,5186 5937.09,5186 D30.1
NetLED1_1: LED1.1 R11.1 | length 344.5
  Top Layer w15: R11.1 260,2130 295,2165 LED1.1
NetLED2_1: LED2.1 R12.1 | length 365
  Top Layer w15: R12.1 960,1955 LED2.1
NetLED3_2: LED3.2 R13.1 | length 432.8
  Top Layer w15: R13.1 1370.06,1960.06 1570.06,1960.06 1620,2010 LED3.2
NetQ1_2: Q1.2 R1.1 | length 232.3
  Top Layer w15: Q1.2 3616.62,4697.48 3634.14,4715 R1.1
NetQ1_3: Q1.3 R3.2 R5.2 | length 363
  Top Layer w15: Q1.3 3567.48,4747.48 3635,4815 R5.2 R3.2
NetQ2_2: Q2.2 R2.1 | length 269.5
  Top Layer w15: R2.1 5180,4670 5215,4705 Q2.2
NetQ2_3: Q2.3 R4.2 R6.2 | length 372.1
  Top Layer w15: R4.2 R6.2 5040,4760 5045,4755 Q2.3
NetR15_2: R15.2 U1.44
NetR16_1: R16.1 SW1.2 U1.7
NetU6_3: U6.3 U8.2 U10.1 | length 646.1
  Top Layer w10: U10.1 4477.23,1948.23 4527,1998 4699,1998 v1(4731,2030) ; v1(4788,2148) 4788.11,2148.11 4937.89,2148.11 U6.3
  Bottom Layer w10: v1(4731,2030) 4788,2087 v1(4788,2148)
OUT0: D4.1 U4.3
OUT1: D6.1 U4.5 | length 2231.8
  Top Layer w8: U4.5 7009.56,2265 7499,2265 7522,2242 9142,2242 9142,2201.34 D6.1
OUT2: D8.1 U4.7
OUT3: D10.1 U4.9
OUT4: D12.1 U5.3
OUT5: D16.1 U5.5
OUT6: D20.1 U5.7
OUT7: D24.1 U5.9
OUT_ACTIVE: D14.1 U10.3
OUT_ACTIVE_3v3: D13.2 U1.14
pDBIN: D28.1 EC3.78 U6.2 U10.5 | length 1638.6
  Bottom Layer w10: U6.2 5061,2048.23 5061,887 4995,821 EC3.78
pDBIN_3v3: D27.2 U1.11
S1_RS232_RX: J1.2 R9.1 | length 814.5
  Top Layer w15: R9.1 4275,4390 4310,4425 J1.2
S1_RS232_TX: J1.1 R3.1 | length 185.2
  Top Layer w15: R3.1 4055,4925 4095,4965 4206.57,4965 J1.1
S1_RX: EC1.5 J1.7 | length 2948.7
  Top Layer w12: EC1.5 1690,5353 1718,5325 4276,5325 4310,5291 J1.7
S1_TTL_RX: Q3.3 R7.2 U1.31 | length 282.5
  Top Layer w15: Q3.3 3420.93,4400 3432.19,4411.26 3432.19,4442.19 3485,4495 R7.2
S1_TTL_TX: R1.2 U1.30
S1_TX: EC1.3 J1.8 | length 2932.1
  Top Layer w12: EC1.3 1590,5353 1650,5293 4178.57,5293 J1.8
S2_RS232_RX: J1.4 R10.1 | length 654.9
  Top Layer w15: J1.4 4506.85,4458.15 4550,4415 4635,4415 R10.1
S2_RS232_TX: J1.3 R4.1 | length 399.3
  Top Layer w15: J1.3 4408.43,4993.43 4430,5015 4615,5015 4640,4990 R4.1
S2_RX: EC2.5 J1.5 | length 2817.6
  Top Layer w12: J1.5 4506.85,5316.85 4532,5342 5377,5342 5395,5324 5395,5268 5450,5213 5858,5213 5966,5321 6804,5321 6860,5377 EC2.5
S2_TTL_RX: Q4.3 R8.2 U1.13 | length 634.5
  Top Layer w15: R8.2 5276.68,4517.68 5365,4606 5365,4737 5386,4758 5494,4758 Q4.3
S2_TTL_TX: R2.2 U1.12
S2_TX: EC2.3 J1.6 | length 2818.3
  Top Layer w12: J1.6 4408.43,5339.43 4440,5371 5406,5371 5436,5341 5436,5276 5461,5251 5849,5251 5950,5352 6720,5352 6760,5392 EC2.3
sINP: D26.1 EC3.46 U6.1 U10.4 | length 4548.5
  Top Layer w10: U10.4 4504.23,2248.23 4548,2292 4840,2292 v1(4842,2294) ; v1(4839,1945) 4934.77,1945 U6.1 4938,1746 4966,1718 v1(7190,1718)
  Top Layer w15: v1(7189,744) 7245,688 EC3.46
  Bottom Layer w10: v1(4839,1945) 4840.5,1946.5 4840.5,2292.5 v1(4842,2294) ; v1(7189,744) 7189.5,744.5 7189.5,1717.5 v1(7190,1718)
sINP_3v3: D25.2 U1.17
sOUT: D22.1 EC3.45 U6.4 U10.2 | length 4532.8
  Top Layer w10: U10.2 4444.23,2048.23 4496,2100 v1(4746,2100) 5079,2100 v1(5080,2101) ; v1(4752,2246) 4753.11,2247.11 4936.89,2247.11 U6.4 ; v1(5097,1757) 5097.5,1756.5 6992.5,1756.5 v1(6993,1756) ; v1(6993,832) 7120,705 EC3.45
  Bottom Layer w10: v1(4746,2100) 4749,2103 4749,2243 v1(4752,2246) ; v1(5080,2101) 5097,2101 v1(5097,1757) ; v1(6993,832) v1(6993,1756)
sOUT_3v3: D21.2 U1.16
SWCLK: P1.3 U1.37
SWDIO: P1.2 U1.34
USBDM: J2.2 U1.32
USBDP: J2.3 R17.1 U1.33
pads on no net: EC1.1 EC1.2 EC1.4 EC1.6 EC1.7 EC1.8 EC1.9 EC1.10 EC1.11 EC1.12 EC1.14 EC1.15 EC1.16 EC1.17 EC1.18 EC1.19 EC1.20 EC1.21 EC1.22 EC1.23 EC1.24 EC1.25 EC1.26 EC2.1 EC2.2 EC2.4 EC2.6 EC2.7 EC2.8 EC2.9 EC2.10 EC2.11 EC2.12 EC2.14 EC2.15 EC2.16 EC2.17 EC2.18 EC2.19 EC2.20 EC2.21 EC2.22 EC2.23 EC2.24 EC2.25 EC2.26 EC3.3 EC3.4 EC3.5 EC3.6 EC3.7 EC3.8 EC3.9 EC3.10 EC3.11 EC3.12 EC3.13 EC3.14 EC3.15 EC3.16 EC3.17 EC3.18 EC3.19 EC3.20 EC3.21 EC3.22 EC3.23 EC3.24 EC3.25 EC3.26 EC3.27 EC3.28 EC3.44 EC3.47 EC3.48 EC3.49 EC3.53 EC3.54 EC3.55 EC3.56 EC3.57 EC3.58 EC3.59 EC3.60 EC3.61 EC3.62 EC3.63 EC3.64 EC3.65 EC3.66 EC3.67 EC3.68 EC3.69 EC3.70 EC3.71 EC3.72 EC3.73 EC3.74 EC3.75 EC3.76 EC3.96 EC3.97 EC3.98 EC3.99 J2.4 J2.6 U1.1 U1.2 U1.3 U1.4 U1.10 U3.None U5.11 U5.12 U5.13 U5.14 U5.15 U6.8 U6.9 U6.10 U6.11 U7.None U8.3 U8.4 U8.5 U8.6 U8.8 U8.9 U8.10 U8.11 U8.12 U8.13 U9.None U10.8 U10.9 U10.10 U10.11 U10.12 U10.13

## Silkscreen, mask and mechanical layers (free items; w line width, h text height)
Top Overlay:
  text "+5V" at 371,2301 h120
  text "+3V3" at 899,2297 h120
  text "-5V" at 1489,2297 h120

## Text inside footprints (layer, text, board x,y; h text height)
U3: Mechanical 4 "1" at 1454.76,1280.16 h73.82; Mechanical 4 "2" at 1554.96,1280.16 h73.82; Mechanical 4 "3" at 1655.02,1280.16 h73.82; Mechanical 4 "1" at 1454.76,1280.16 h73.82; Mechanical 4 "2" at 1554.96,1280.16 h73.82; Mechanical 4 "3" at 1655.02,1280.16 h73.82
U7: Mechanical 4 "1" at 334.76,1280.16 h73.82; Mechanical 4 "2" at 434.96,1280.16 h73.82; Mechanical 4 "3" at 535.02,1280.16 h73.82; Mechanical 4 "1" at 334.76,1280.16 h73.82; Mechanical 4 "2" at 434.96,1280.16 h73.82; Mechanical 4 "3" at 535.02,1280.16 h73.82
U9: Mechanical 4 "1" at 894.76,1280.16 h73.82; Mechanical 4 "2" at 994.96,1280.16 h73.82; Mechanical 4 "3" at 1095.02,1280.16 h73.82; Mechanical 4 "1" at 894.76,1280.16 h73.82; Mechanical 4 "2" at 994.96,1280.16 h73.82; Mechanical 4 "3" at 1095.02,1280.16 h73.82